# Altium PCB corePCB.PcbDoc (part 3 of 3)
Units mil, origin at the board's own origin, x right, y up, seen from the top; angles counter-clockwise.
Board outline 3543.31 x 3543.31 mil, 4 copper layers (Top Layer, Layer 1, Layer 2, Bottom Layer), stack 23.756 mil thick; 90 components, 166 nets, 640 pads, 472 vias.
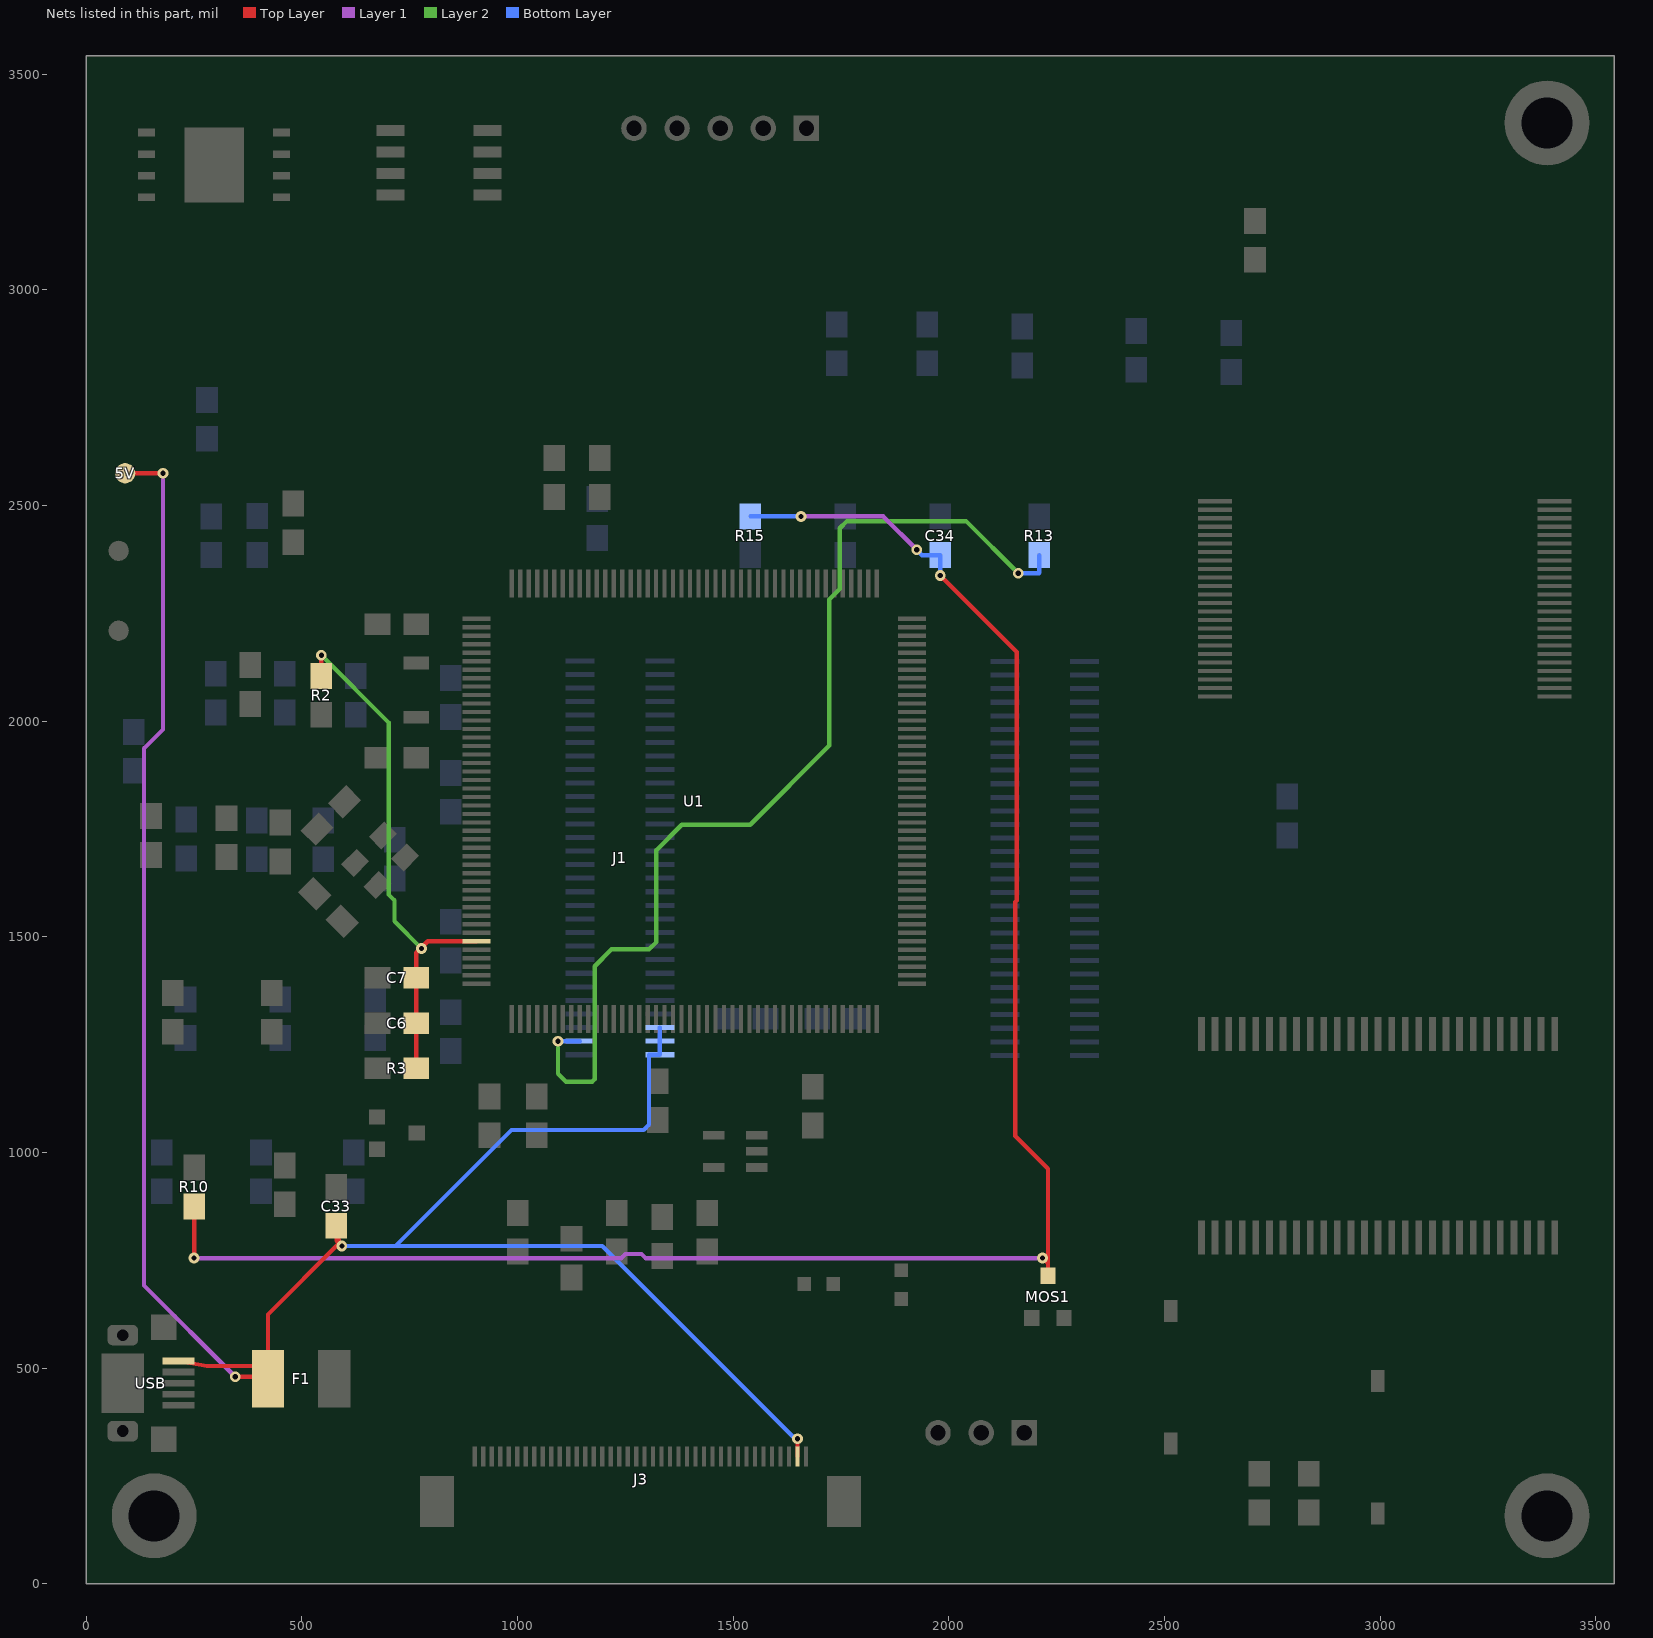
[diagram p5: the nets of this part, all layers, seen from the top]

## Via types
v1: diameter 25, hole 12, Top Layer to Bottom Layer, 472 vias

## Nets (pads, with @x,y where several pads share a name; then routed paths per layer and width w, separated by ;. In a path a pad name is that pad's centre, name@x,y a point inside that pad or via, vN(x,y) a via of type N, cw(c..) or ccw(c..) an arc to the next point about the centre after c; other vN are vias at no path point) (continued)
VCC5: 5V.1 C33.1 F1.1 J1.58 J1.59 J1.60 J3.2 USB.1 | length 5286.4
  Top Layer w10: 5V.1@90,2575 v1(178,2575) ; USB.1@214,516.18 280.08,505 F1.1@421.46,505 ; v1(345.5,480) F1.1@421.46,480 ; F1.1@421.46,475 F1.1@421.46,480 ; v1(592.56,783) v1@586.31,789.25 ; J3.2@1649.02,295 v1(1649,336) ; F1.1@421.46,480 F1.1@421.46,505 ; F1.1@421.46,505 421.46,624.39 v1@586.31,789.25 ; v1@586.31,789.25 580.06,795.5 C33.1@580.06,830 v1@586.31,789.25
  Layer 1 w10: v1(178,2575) 178,1981 134,1937 134,691.5 v1(345.5,480)
  Bottom Layer w10: v1(592.56,783) 717,783 ; J1.58@1330,1289.61 J1.59@1330,1258.11 J1.60@1330,1226.61 1305,1226.61 1305,1064.5 1292.5,1052 986,1052 717,783 ; v1(1649,336) 1643.38,336 1196.38,783 717,783
VCC_LED: C34.1 MOS1.3 R10.1 R15.2 | length 4367.5
  Top Layer w10: v1(250,755) R10.1@250,875 ; v1(1980.06,2338) 2157.5,2160.56 2157.5,1584.4 2154,1580.9 2154,1038 2230,962 2230,742.5 ; v1(2217.5,755) 2230,742.5 ; MOS1.3@2230,714.21 2230,742.5
  Layer 1 w10: v1(250,755) 1240.56,755 1250.06,764.5 1287.56,764.5 1297.06,755 v1(2217.5,755) ; v1(1657,2475) 1848.06,2475 v1(1925.56,2397.5)
  Bottom Layer w10: R15.2@1540.06,2475 v1(1657,2475) ; v1(1925.56,2397.5) 1938.06,2385 C34.1@1980.06,2385 v1(1980.06,2338)
VDDA: C6.2 C7.2 R2.2 R3.1 U1.39 | length 1259.6
  Top Layer w10: R2.2@545.06,2105 v1(545.06,2153) ; R3.1@765,1195.06 C6.2@765,1299.94 C7.2@765,1404.94 765,1463.02 ; v1(777.5,1473) 765,1463.02 ; U1.39@905.3,1489.74 791.72,1489.74 765,1463.02
  Layer 2 w10: v1(545.06,2153) 701,1997.06 701,1598 714.5,1584.5 714.5,1536 v1(777.5,1473)
VREF+: J1.2 R13.1 | length 2439.3
  Layer 2 w10: v1(1094,1258) 1094,1182.5 1112.5,1164 1173,1164 1179,1170 1179,1432 1218,1471 1305,1471 1322,1488 1322,1701 1381,1760 1539.43,1760 1723,1943.57 1723,2282.17 1747.28,2306.44 1747.28,2447.28 1764,2464 2040,2464 v1(2161,2343)
  Bottom Layer w10: v1(1094,1258) 1094.11,1258.11 J1.2@1144.96,1258.11 ; v1(2161,2343) 2209.06,2343 2210.06,2344 R13.1@2210.06,2385
pads on no net: U3.40 U4.1 U4.2 U4.3 U4.4 U4.5 U4.6 U4.10 U4.11 U4.14 U4.15 U4.20 U4.21 U4.22 U4.23 U4.24 U4.25 U4.26 U4.27 U4.28 U4.33 U4.34 U4.35 U4.38 U4.39 U4.40 U4.45 U4.46 U4.47 U4.48 U6.9 USB.4

## Polygon pours and split planes (outlines as drawn)
no net on Bottom Layer "NONET_L04_P000" (solid, pour order 0): 0,3543.31 3543.31,3543.31 3543.31,0 0,0 0,3543.31 3543.31,3543.31 3543.31,0 0,0 0,20 15,35
no net on Bottom Layer "Bottom Layer-No Net" (solid, pour order 2): -815,1035

## Keep-outs
Keep-Out Layer:
  the board outline again, w10

## Text inside footprints (layer, text, board x,y; h text height)
J3: Top Overlay "40" at 924.7,358 h30 r180; Top Overlay "1" at 1672.7,354 h30 r180